# Altium PCB ECOGr2.PcbDoc
Units mm, origin at the board's own origin, x right, y up, seen from the top; angles counter-clockwise.
Board outline 24 x 30.4 mm, 2 copper layers (Top Layer, Bottom Layer); 164 components, 89 nets, 439 pads, 9 vias.
Unrouted connection lines stored in the file: 336.
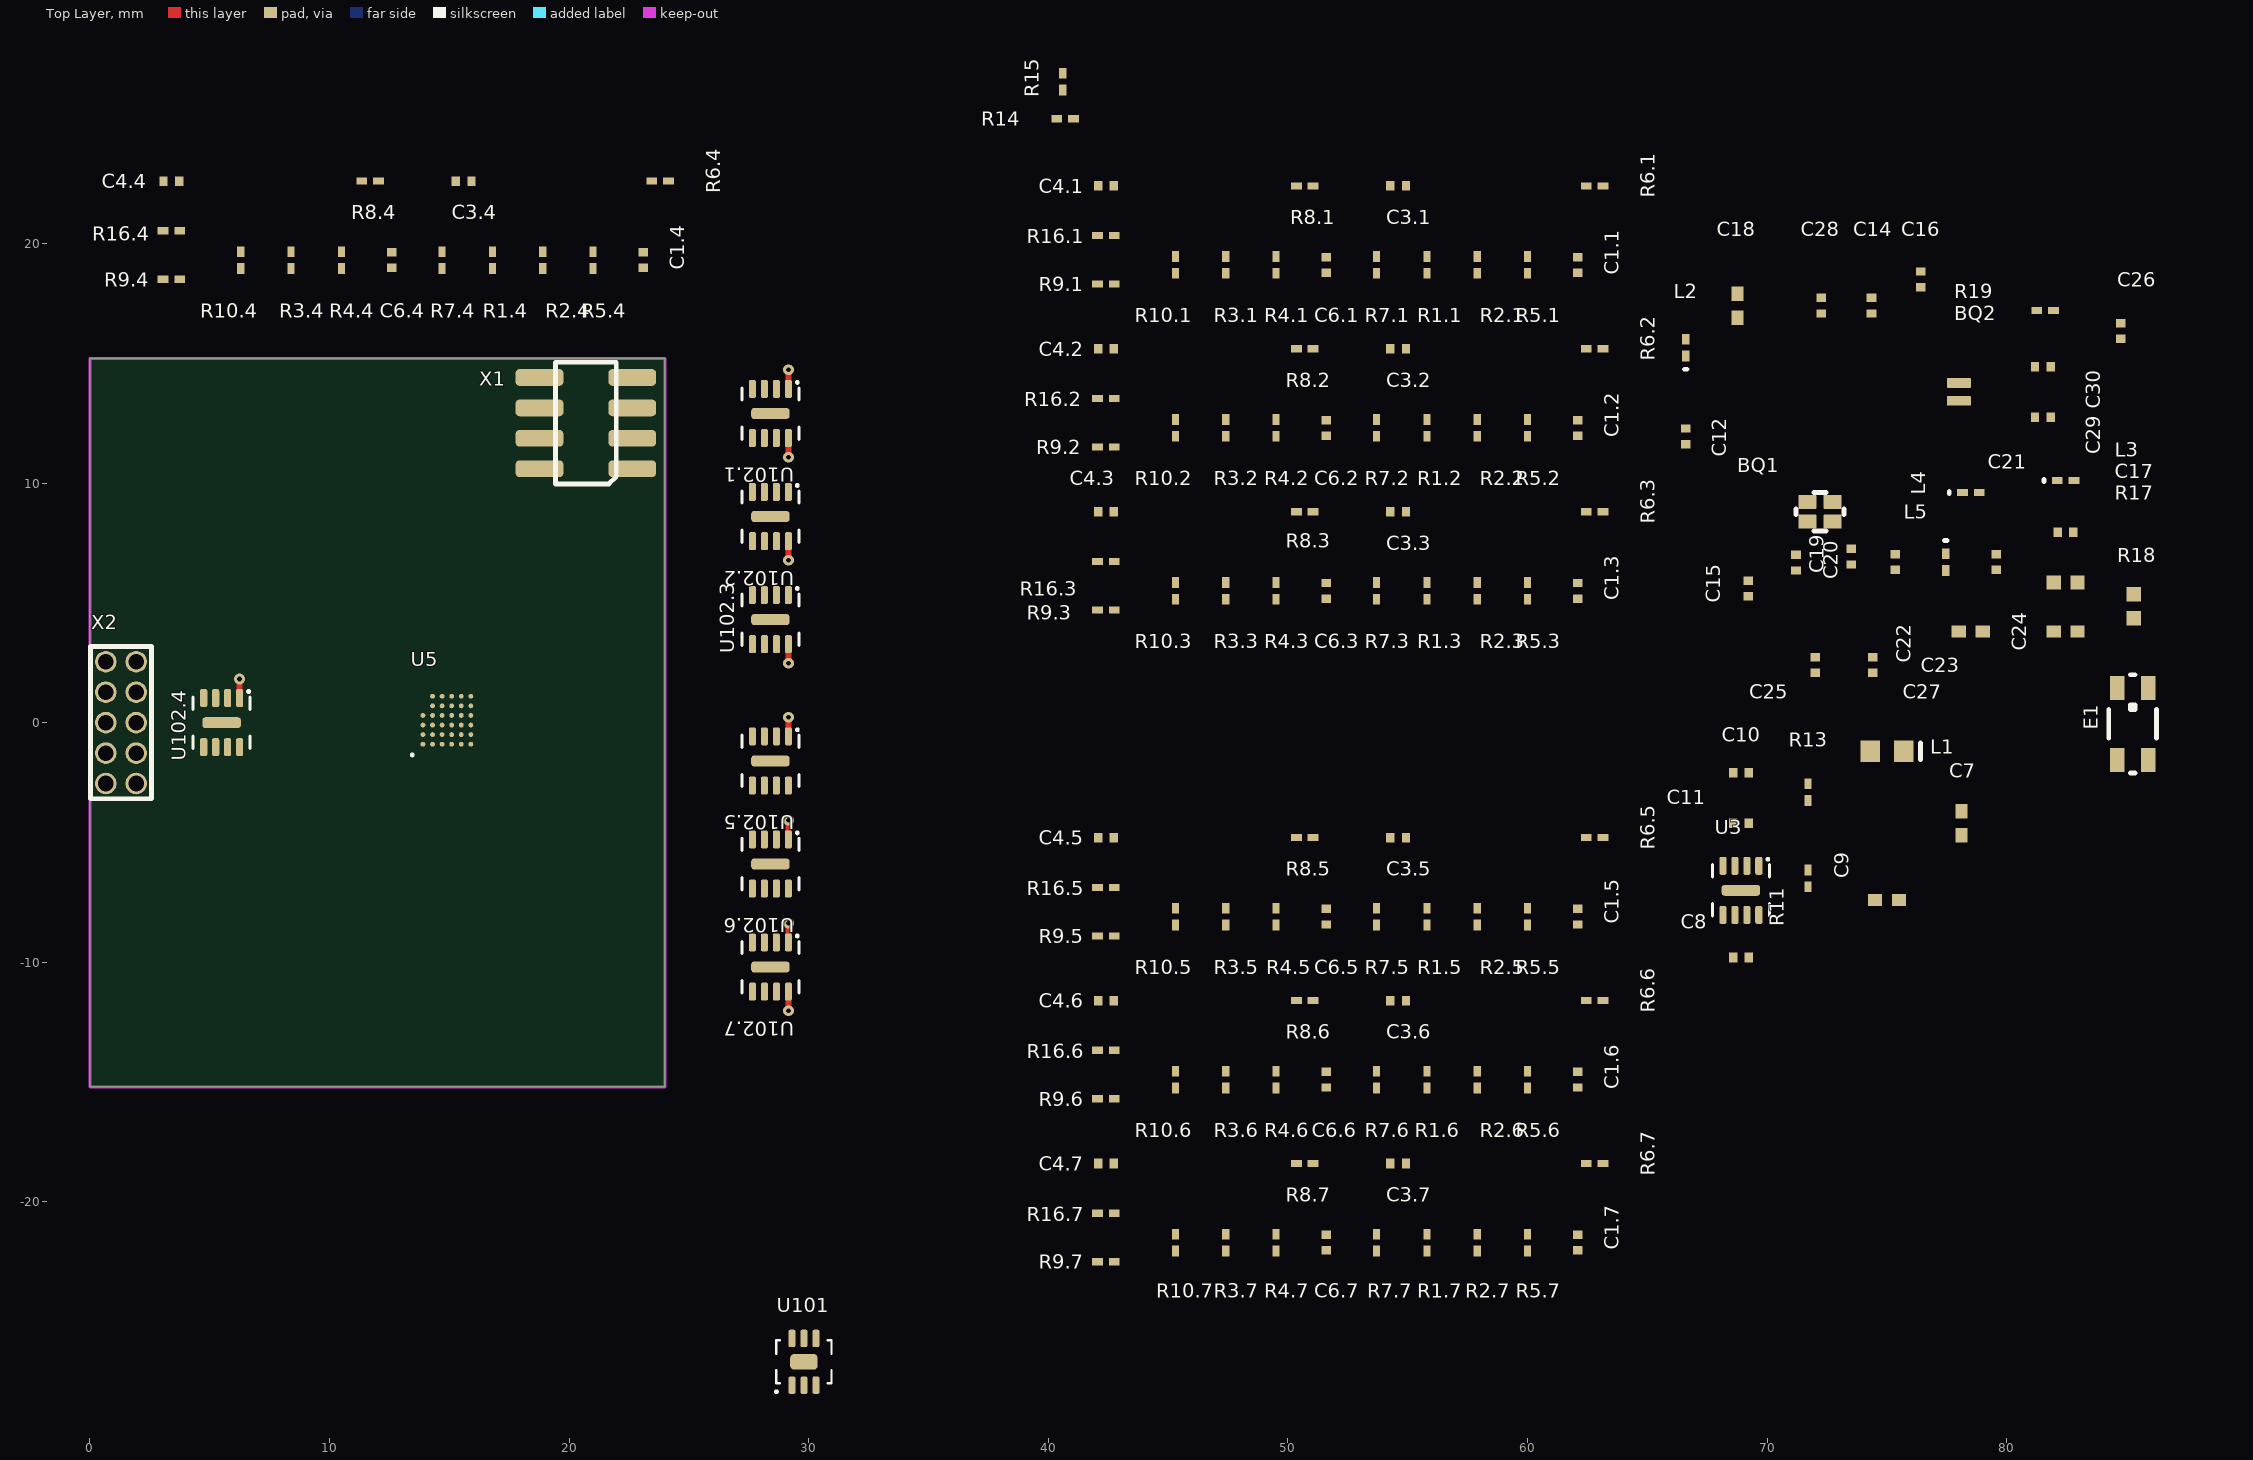
[diagram p0: Top Layer view]
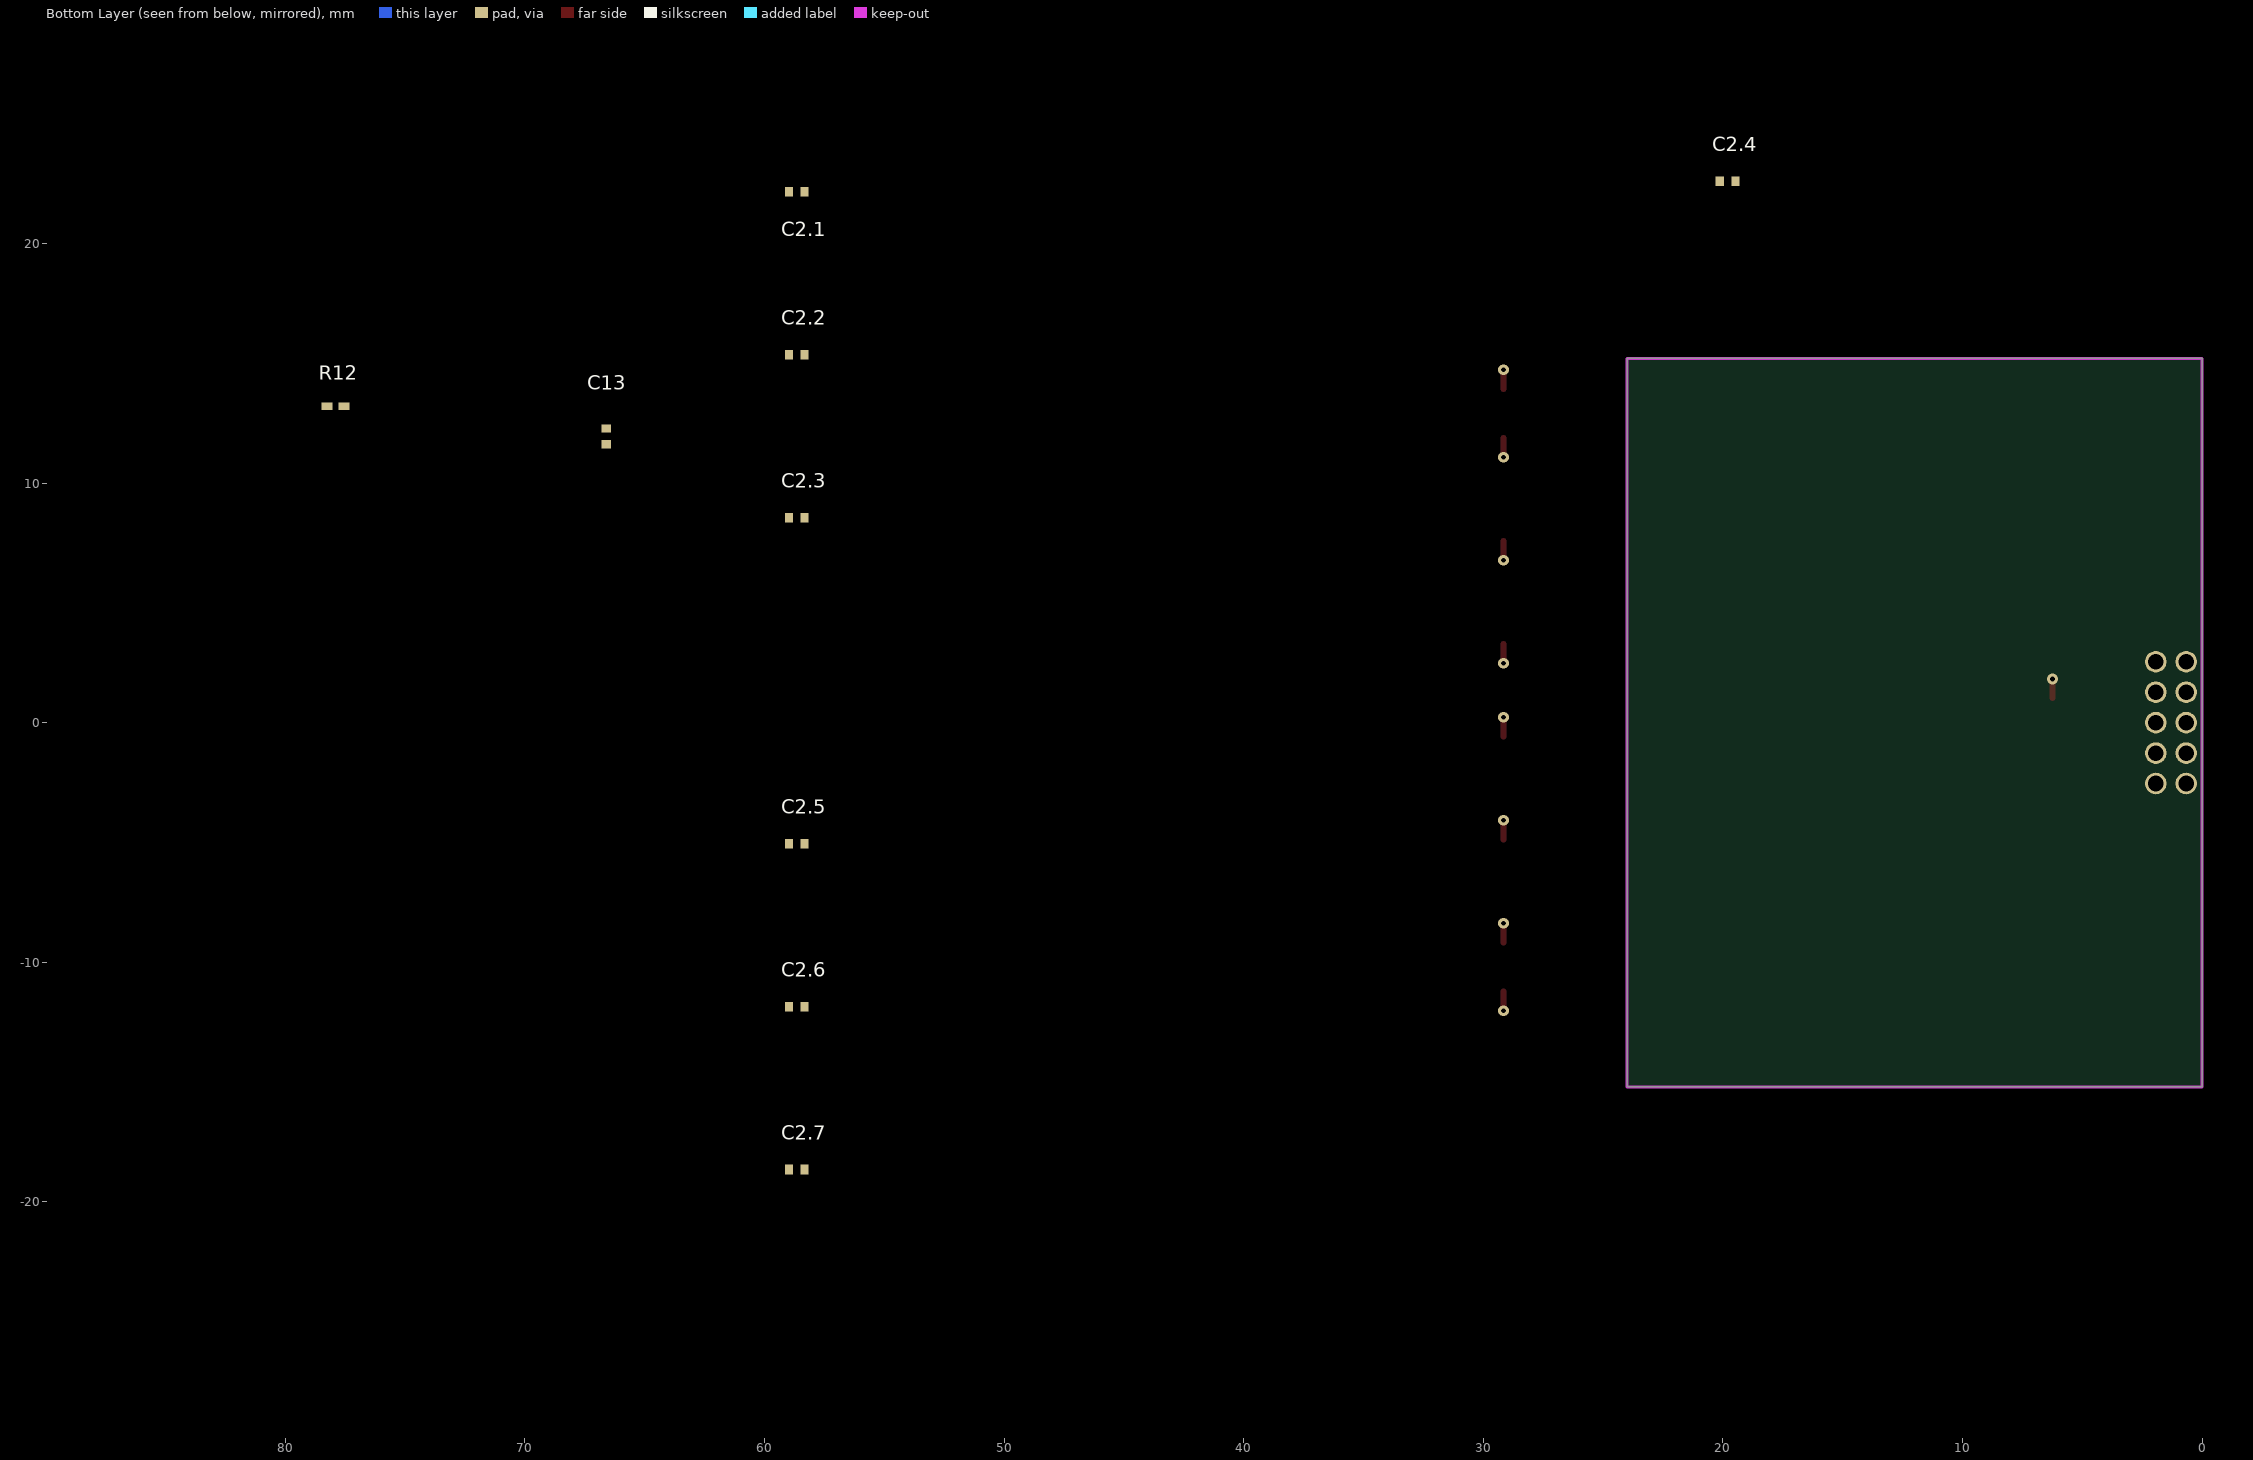
[diagram p1: Bottom Layer view, seen from below]

## Layer stack, top to bottom
Top Solder: solder mask 0.0102, Solder Resist, Dk 3.5
Top Layer: signal copper 0.0356
Dielectric 1: dielectric 0.32, FR-4, Dk 4.8
Bottom Layer: signal copper 0.0356
Bottom Solder: solder mask 0.0102, Solder Resist, Dk 3.5

## Board outline
0,-15.2 24,-15.2 24,15.2 0,15.2

## Design rules (kind name [scope] priority, off if disabled: settings)
Clearance ClearancePoly [InPoly] p1: gap=0.25 ignorepadtopadclearanceinfootprint=FALSE
Clearance [All] p2: gap=0.125 ignorepadtopadclearanceinfootprint=FALSE
HoleSize [All] p1: absolutevalues=TRUE maxlimit=0.9 minlimit=0.2 maxpercent=80.000 minpercent=20.000
PolygonConnect PolygonConnectE1 [HasFootprint('2450AT18D0100')] p1: connectstyle=Direct reliefconductorwidth=0.254 reliefentries=4 polygonreliefangle="90 Angle" airgapwidth=0.254
PolygonConnect [All] p2: thpad.connectstyle=Relief thpad.reliefconductorwidth=0.25 thpad.reliefentries=4 thpad.polygonreliefangle="90 Angle" thpad.airgapwidth=0.25 smdpad.connectstyle=Relief smdpad.reliefconductorwidth=0.25 smdpad.reliefentries=4 smdpad.polygonreliefangle="90 Angle" smdpad.airgapwidth=0.25 via.connectstyle=Direct via.reliefconductorwidth=0.25 via.reliefentries=4 via.polygonreliefangle="90 Angle" via.airgapwidth=0.25
RoutingVias [All] p1: holewidth=0.2 width=0.45 viastyle="Through Hole" minholewidth=0.2 minwidth=0.45 maxholewidth=0.9 maxwidth=1.5
SolderMaskExpansion [All] p1: expansion=0.102
Width [All] p1: maxlimit=0.5 minlimit=0.125 preferedwidth=0.25
29 further rules are at their usual default settings.

## Classes and differential pairs
channel class AinCHr2: A1 A2 A3 A4 A5 A6 A7

## Components (designator, comment, footprint, x,y, rotation, side; value= is the part's Value field where it differs from the comment)
BQ1 "KX-4 24MHz" KX–4 72.2,8.8 r180 top
BQ2 "KX-327" KX–327VT 78,13.8 r270 top value=KX-327VT
C1.1 "1nF 16V" CAPC0603L 62.1,19.1 r270 top (schematic designator C1)
C1.2 "1nF 16V" CAPC0603L 62.1,12.3 r270 top (schematic designator C1)
C1.3 "1nF 16V" CAPC0603L 62.1,5.5 r270 top (schematic designator C1)
C1.4 "1nF 16V" CAPC0603L 23.1,19.3 r270 top (schematic designator C1)
C1.5 "1nF 16V" CAPC0603L 62.1,-8.1 r270 top (schematic designator C1)
C1.6 "1nF 16V" CAPC0603L 62.1,-14.9 r270 top (schematic designator C1)
C1.7 "1nF 16V" CAPC0603L 62.1,-21.7 r270 top (schematic designator C1)
C2.1 "100nF 16V" CAPC0603L 58.65,22.15 r180 bottom (schematic designator C2)
C2.2 "100nF 16V" CAPC0603L 58.65,15.35 r180 bottom (schematic designator C2)
C2.3 "100nF 16V" CAPC0603L 58.65,8.55 r180 bottom (schematic designator C2)
C2.4 "100nF 16V" CAPC0603L 19.8,22.6 r180 bottom (schematic designator C2)
C2.5 "100nF 16V" CAPC0603L 58.65,-5.05 r180 bottom (schematic designator C2)
C2.6 "100nF 16V" CAPC0603L 58.65,-11.85 r180 bottom (schematic designator C2)
C2.7 "100nF 16V" CAPC0603L 58.65,-18.65 r180 bottom (schematic designator C2)
C3.1 "10nF 16V" CAPC0603L 54.6,22.4 r180 top (schematic designator C3)
C3.2 "10nF 16V" CAPC0603L 54.6,15.6 r180 top (schematic designator C3)
C3.3 "10nF 16V" CAPC0603L 54.6,8.8 r180 top (schematic designator C3)
C3.4 "10nF 16V" CAPC0603L 15.6,22.6 r180 top (schematic designator C3)
C3.5 "10nF 16V" CAPC0603L 54.6,-4.8 r180 top (schematic designator C3)
C3.6 "10nF 16V" CAPC0603L 54.6,-11.6 r180 top (schematic designator C3)
C3.7 "10nF 16V" CAPC0603L 54.6,-18.4 r180 top (schematic designator C3)
C4.1 "1uF 6.3V" CAPC0603L 42.4,22.4 r0 top (schematic designator C4)
C4.2 "1uF 6.3V" CAPC0603L 42.4,15.6 r0 top (schematic designator C4)
C4.3 "1uF 6.3V" CAPC0603L 42.4,8.8 r0 top (schematic designator C4)
C4.4 "1uF 6.3V" CAPC0603L 3.4,22.6 r0 top (schematic designator C4)
C4.5 "1uF 6.3V" CAPC0603L 42.4,-4.8 r0 top (schematic designator C4)
C4.6 "1uF 6.3V" CAPC0603L 42.4,-11.6 r0 top (schematic designator C4)
C4.7 "1uF 6.3V" CAPC0603L 42.4,-18.4 r0 top (schematic designator C4)
C6.1 "4.7uF 4V" CAPC0603L 51.6,19.1 r90 top (schematic designator C6)
C6.2 "4.7uF 4V" CAPC0603L 51.6,12.3 r90 top (schematic designator C6)
C6.3 "4.7uF 4V" CAPC0603L 51.6,5.5 r90 top (schematic designator C6)
C6.4 "4.7uF 4V" CAPC0603L 12.6,19.3 r90 top (schematic designator C6)
C6.5 "4.7uF 4V" CAPC0603L 51.6,-8.1 r90 top (schematic designator C6)
C6.6 "4.7uF 4V" CAPC0603L 51.6,-14.9 r90 top (schematic designator C6)
C6.7 "4.7uF 4V" CAPC0603L 51.6,-21.7 r90 top (schematic designator C6)
C7 "10u 6.3V" CAPC1005L 78.1,-4.2 r270 top
C8 "100nF 16V" CAPC0603L 68.9,-9.8 r180 top
C9 "10u 6.3V" CAPC1005L 75,-7.4 r0 top
C10 "4.7uF 4V" CAPC0603L 68.9,-2.1 r180 top
C11 "100nF 16V" CAPC0603L 68.9,-4.2 r180 top
C12 "100nF 16V" CAPC0603L 66.6,11.95 r270 top
C13 "4.7uF 4V" CAPC0603L 66.6,11.95 r270 bottom
C14 "100nF 16V" CAPC0603L 74.35,17.4 r90 top
C15 "100nF 16V" CAPC0603L 69.2,5.6 r270 top
C16 "4.7uF 4V" CAPC0603L 76.4,18.5 r90 top
C17 "6.8p 50V" CAPC0603L 82.45,7.95 r0 top
C18 "10u 6.3V" CAPC1005L 68.75,17.4 r90 top
C19 "100nF 16V" CAPC0603L 73.5,6.925 r270 top
C20 "100nF 16V" CAPC0603L 71.2,6.675 r270 top
C21 "1p 50V" CAPC0603L 79.55,6.7 r270 top
C22 "1p 50V" CAPC0603L 75.35,6.7 r270 top
C23 "DNM" CAPC1005L 78.5,3.8 r0 top
C24 "DNM" CAPC1005L 82.45,3.8 r0 top
C25 "8pF 25V" CAPC0603L 72,2.4 r270 top
C26 "100nF 16V" CAPC0603L 84.75,16.35 r270 top
C27 "8pF 25V" CAPC0603L 74.4,2.4 r270 top
C28 "1uF 6.3V" CAPC0603L 72.25,17.4 r90 top
C29 "12pF 25V" CAPC0603L 81.5,12.75 r0 top
C30 "12pF 25V" CAPC0603L 81.5,14.85 r0 top
E1 "2450AT18D0100" 2450AT18D0100 85.25,-0.05 r270 top
L1 "4.7uH" INDC1608L 75,-1.2 r180 top
L2 "10uH" INDC0603L 66.6,15.65 r90 top
L3 "2.4nH" INDC0603L 82.45,10.1 r0 top
L4 "6.2nH" INDC0603L 78.5,9.6 r0 top
L5 "2.7nH" INDC0603L 77.45,6.7 r270 top
R1.1 "1k" RESC0603L 55.8,19.1 r270 top (schematic designator R1)
R1.2 "1k" RESC0603L 55.8,12.3 r270 top (schematic designator R1)
R1.3 "1k" RESC0603L 55.8,5.5 r270 top (schematic designator R1)
R1.4 "1k" RESC0603L 16.8,19.3 r270 top (schematic designator R1)
R1.5 "1k" RESC0603L 55.8,-8.1 r270 top (schematic designator R1)
R1.6 "1k" RESC0603L 55.8,-14.9 r270 top (schematic designator R1)
R1.7 "1k" RESC0603L 55.8,-21.7 r270 top (schematic designator R1)
R2.1 "38k3" RESC0603L 57.9,19.1 r270 top (schematic designator R2)
R2.2 "38k3" RESC0603L 57.9,12.3 r270 top (schematic designator R2)
R2.3 "38k3" RESC0603L 57.9,5.5 r270 top (schematic designator R2)
R2.4 "38k3" RESC0603L 18.9,19.3 r270 top (schematic designator R2)
R2.5 "38k3" RESC0603L 57.9,-8.1 r270 top (schematic designator R2)
R2.6 "38k3" RESC0603L 57.9,-14.9 r270 top (schematic designator R2)
R2.7 "38k3" RESC0603L 57.9,-21.7 r270 top (schematic designator R2)
R3.1 "1k" RESC0603L 47.4,19.1 r270 top (schematic designator R3)
R3.2 "1k" RESC0603L 47.4,12.3 r270 top (schematic designator R3)
R3.3 "1k" RESC0603L 47.4,5.5 r270 top (schematic designator R3)
R3.4 "1k" RESC0603L 8.4,19.3 r270 top (schematic designator R3)
R3.5 "1k" RESC0603L 47.4,-8.1 r270 top (schematic designator R3)
R3.6 "1k" RESC0603L 47.4,-14.9 r270 top (schematic designator R3)
R3.7 "1k" RESC0603L 47.4,-21.7 r270 top (schematic designator R3)
R4.1 "38k3" RESC0603L 49.5,19.1 r270 top (schematic designator R4)
R4.2 "38k3" RESC0603L 49.5,12.3 r270 top (schematic designator R4)
R4.3 "38k3" RESC0603L 49.5,5.5 r270 top (schematic designator R4)
R4.4 "38k3" RESC0603L 10.5,19.3 r270 top (schematic designator R4)
R4.5 "38k3" RESC0603L 49.5,-8.1 r270 top (schematic designator R4)
R4.6 "38k3" RESC0603L 49.5,-14.9 r270 top (schematic designator R4)
R4.7 "38k3" RESC0603L 49.5,-21.7 r270 top (schematic designator R4)
R5.1 "26k1" RESC0603L 60,19.1 r270 top (schematic designator R5)
R5.2 "26k1" RESC0603L 60,12.3 r270 top (schematic designator R5)
R5.3 "26k1" RESC0603L 60,5.5 r270 top (schematic designator R5)
R5.4 "26k1" RESC0603L 21,19.3 r270 top (schematic designator R5)
R5.5 "26k1" RESC0603L 60,-8.1 r270 top (schematic designator R5)
R5.6 "26k1" RESC0603L 60,-14.9 r270 top (schematic designator R5)
R5.7 "26k1" RESC0603L 60,-21.7 r270 top (schematic designator R5)
R6.1 "0" RESC0603L 62.8,22.4 r180 top (schematic designator R6)
R6.2 "0" RESC0603L 62.8,15.6 r180 top (schematic designator R6)
R6.3 "0" RESC0603L 62.8,8.8 r180 top (schematic designator R6)
R6.4 "0" RESC0603L 23.8,22.6 r180 top (schematic designator R6)
R6.5 "0" RESC0603L 62.8,-4.8 r180 top (schematic designator R6)
R6.6 "0" RESC0603L 62.8,-11.6 r180 top (schematic designator R6)
R6.7 "0" RESC0603L 62.8,-18.4 r180 top (schematic designator R6)
R7.1 "187k" RESC0603L 53.7,19.1 r90 top (schematic designator R7)
R7.2 "187k" RESC0603L 53.7,12.3 r90 top (schematic designator R7)
R7.3 "187k" RESC0603L 53.7,5.5 r90 top (schematic designator R7)
R7.4 "187k" RESC0603L 14.7,19.3 r90 top (schematic designator R7)
R7.5 "187k" RESC0603L 53.7,-8.1 r90 top (schematic designator R7)
R7.6 "187k" RESC0603L 53.7,-14.9 r90 top (schematic designator R7)
R7.7 "187k" RESC0603L 53.7,-21.7 r90 top (schematic designator R7)
R8.1 "26k1" RESC0603L 50.7,22.4 r0 top (schematic designator R8)
R8.2 "26k1" RESC0603L 50.7,15.6 r0 top (schematic designator R8)
R8.3 "26k1" RESC0603L 50.7,8.8 r0 top (schematic designator R8)
R8.4 "26k1" RESC0603L 11.7,22.6 r0 top (schematic designator R8)
R8.5 "26k1" RESC0603L 50.7,-4.8 r0 top (schematic designator R8)
R8.6 "26k1" RESC0603L 50.7,-11.6 r0 top (schematic designator R8)
R8.7 "26k1" RESC0603L 50.7,-18.4 r0 top (schematic designator R8)
R9.1 "10M" RESC0603L 42.4,18.3 r180 top (schematic designator R9)
R9.2 "10M" RESC0603L 42.4,11.5 r180 top (schematic designator R9)
R9.3 "10M" RESC0603L 42.4,4.7 r180 top (schematic designator R9)
R9.4 "10M" RESC0603L 3.4,18.5 r180 top (schematic designator R9)
R9.5 "10M" RESC0603L 42.4,-8.9 r180 top (schematic designator R9)
R9.6 "10M" RESC0603L 42.4,-15.7 r180 top (schematic designator R9)
R9.7 "10M" RESC0603L 42.4,-22.5 r180 top (schematic designator R9)
R10.1 "511k" RESC0603L 45.3,19.1 r270 top (schematic designator R10)
R10.2 "511k" RESC0603L 45.3,12.3 r270 top (schematic designator R10)
R10.3 "511k" RESC0603L 45.3,5.5 r270 top (schematic designator R10)
R10.4 "511k" RESC0603L 6.3,19.3 r270 top (schematic designator R10)
R10.5 "511k" RESC0603L 45.3,-8.1 r270 top (schematic designator R10)
R10.6 "511k" RESC0603L 45.3,-14.9 r270 top (schematic designator R10)
R10.7 "511k" RESC0603L 45.3,-21.7 r270 top (schematic designator R10)
R11 "10k" RESC0603L 71.7,-6.5 r270 top
R12 "10k" RESC0603L 77.9,13.2 r180 bottom
R13 "10k" RESC0603L 71.7,-2.9 r270 top
R14 "4k99" RESC0603L 40.7,25.2 r180 top
R15 "0" RESC0603L 40.6,26.75 r270 top
R16.1 "0" RESC0603L 42.4,20.325 r180 top (schematic designator R16)
R16.2 "0" RESC0603L 42.4,13.525 r180 top (schematic designator R16)
R16.3 "0" RESC0603L 42.4,6.725 r180 top (schematic designator R16)
R16.4 "0" RESC0603L 3.4,20.525 r180 top (schematic designator R16)
R16.5 "0" RESC0603L 42.4,-6.875 r180 top (schematic designator R16)
R16.6 "0" RESC0603L 42.4,-13.675 r180 top (schematic designator R16)
R16.7 "0" RESC0603L 42.4,-20.475 r180 top (schematic designator R16)
R17 "0" RESC1005L 82.45,5.85 r0 top
R18 "0" RESC1005L 85.3,4.85 r270 top
R19 "100k" RESC0603L 81.6,17.2 r180 top
U3 "LMX358IQ2T" SON50P200X60_HS-9L 68.9,-7 r270 top
U5 "Bluetooth wireless MCU" BGA34C40P6X6_268X268X57 14.9,0.1 r90 top value=CC2640R2FYFV
U101 "Step-up converter" SON50P150X60_HS-7L 29.8,-26.675 r90 top value=SC120ULTRT
U102.1 "LMX358IQ2T" SON50P200X60_HS-9L 28.4,12.9 r270 top (schematic designator U102)
U102.2 "LMX358IQ2T" SON50P200X60_HS-9L 28.4,8.6 r270 top (schematic designator U102)
U102.3 "LMX358IQ2T" SON50P200X60_HS-9L 28.4,4.3 r270 top (schematic designator U102)
U102.4 "LMX358IQ2T" SON50P200X60_HS-9L 5.5,0 r270 top (schematic designator U102)
U102.5 "LMX358IQ2T" SON50P200X60_HS-9L 28.4,-1.6 r270 top (schematic designator U102)
U102.6 "LMX358IQ2T" SON50P200X60_HS-9L 28.4,-5.9 r270 top (schematic designator U102)
U102.7 "LMX358IQ2T" SON50P200X60_HS-9L 28.4,-10.2 r270 top (schematic designator U102)
X1 "CLP-104-02-L-D" HDR-1.27mm-2X4-smd 20.7,12.5 r90 top
X2 "Amphenol FCI 20021311-00010T4LF" HDR-1.27mm-2X5 1.3,0 r270 top

## Footprints (in the part's own frame and the unit in brackets; to place one, negate y for a bottom-side part, rotate by r counter-clockwise, add the part's x,y. Pads: shape width x height; smd on the part's side, far side on the other; paste and mask are expansions set on the pad)
2450AT18D0100 [mm] "2.45 GHz SMD Antenna"
  rect 1x0.6 smd: 1(-1.5,-0.65) 2(-1.5,0.65) 2(1.5,0.65) 2(1.5,-0.65)
  silkscreen extent -2.05,-1 2.05,1, body extent -1.6,-0.8 1.6,0.8, height 1.2
BGA34C40P6X6_268X268X57 [mm] "BGA, 34-Leads, Body 2,68x2,68mmx0,57mm, Pitch 0,40mm"
  round 0.2 smd: A1(-1,1) A2(-0.6,1) A3(-0.2,1) A4(0.2,1) B1(-1,0.6) B2(-0.6,0.6) B3(-0.2,0.6) B4(0.2,0.6) B5(0.6,0.6) B6(1,0.6) C1(-1,0.2) C2(-0.6,0.2) C3(-0.2,0.2) C4(0.2,0.2) C5(0.6,0.2) C6(1,0.2) D1(-1,-0.2) D2(-0.6,-0.2) D3(-0.2,-0.2) D4(0.2,-0.2) D5(0.6,-0.2) D6(1,-0.2) E1(-1,-0.6) E2(-0.6,-0.6) E3(-0.2,-0.6) E4(0.2,-0.6) E5(0.6,-0.6) E6(1,-0.6) F1(-1,-1) F2(-0.6,-1) F3(-0.2,-1) F4(0.2,-1) F5(0.6,-1) F6(1,-1)
  silkscreen extent -1.49,1.4 -1.4,1.49, body extent -1.34,-1.34 1.34,1.34, height 0.58
CAPC0603L [mm] "Chip Capacitor, Body 0.6x0.3mm, IPC High Density"
  rect 0.35x0.4 smd: 1(-0.325,0) 2(0.325,0)
  body extent -0.35,-0.2 0.35,0.2, height 0.6
CAPC1005L [mm] "Chip Capacitor, Body 1.0x0.5mm, IPC High Density"
  rect 0.6x0.5 smd: 1(-0.5,0) 2(0.5,0)
  body extent -0.55,-0.3 0.55,0.3, height 0.6
HDR-1.27mm-2X4-smd [mm] "Header 1.27mm"
  rrect50% 0.7x2 smd: 1(-1.905,-1.935) 2(-1.905,1.935) 3(-0.635,-1.935) 4(-0.635,1.935) 5(0.635,-1.935) 6(0.635,1.935) 7(1.905,-1.935) 8(1.905,1.935)
  silkscreen extent -2.54,-1.27 2.54,1.27, body extent -2.54,-1.27 2.55,1.27, height 1.5
HDR-1.27mm-2X5 [mm] "Header 1.27mm"
  round 0.9 hole 0.65: 1(-2.54,-0.635) 2(-2.54,0.635) 3(-1.27,-0.635) 4(-1.27,0.635) 5(0,-0.635) 6(0,0.635) 7(1.27,-0.635) 8(1.27,0.635) 9(2.54,-0.635) 10(2.54,0.635)
  silkscreen extent -3.18,-1.27 3.18,1.27, body extent -3.18,-1.27 3.18,1.27, height 1.5
INDC0603L [mm] "Chip Inductor, Body 0.6x0.3mm, IPC High Density"
  rect 0.45x0.3 smd: 1(-0.35,0) 2(0.35,0)
  silkscreen extent -0.9,-0.05 -0.9,0.05, body extent -0.33,-0.18 0.33,0.18, height 0.35
INDC1608L [mm] "Chip Inductor, Body 1.6x0.8mm, IPC High Density"
  rect 0.8x0.9 smd: 1(-0.7,0) 2(0.7,0)
  silkscreen extent -1.4,-0.35 -1.4,0.35, body extent -0.87,-0.48 0.87,0.48, height 0.71
KX–4 [mm]
  rrect10% 0.75x0.58 smd: 1(-0.525,-0.41) 2(0.525,-0.41) 3(0.525,0.41) 4(-0.525,0.41)
  silkscreen extent -1,-0.8 1,0.8, body extent -0.8,-0.6 0.8,0.6, height 0.8
KX–327VT [mm] "Tuning Fork Crystal"
  rrect10% 0.4x1 smd: 1(-0.375,0) 2(0.375,0)
  body extent -0.62,-0.53 0.62,0.52, height 0.5
RESC0603L [mm] "Chip Resistor, Body 0.6x0.3mm, IPC High Density"
  rect 0.45x0.3 smd: 1(-0.35,0) 2(0.35,0)
  body extent -0.32,-0.17 0.32,0.17, height 0.3
RESC1005L [mm] "Chip Resistor, Body 1.1x0.5mm, IPC High Density"
  rect 0.6x0.6 smd: 1(-0.5,0) 2(0.5,0)
  body extent -0.55,-0.3 0.55,0.3, height 0.4
SON50P150X60_HS-7L [mm] "SON, 6-Leads, Body 2.00x1.50mm, Pitch 0.50mm, Thermal Pad 1.15x0.19mm, IPC High Density"
  rrect50% 0.73x0.29 smd: 1(-0.975,0.5) 2(-0.975,0) 3(-0.975,-0.5) 4(0.975,-0.5) 5(0.975,0) 6(0.975,0.5)
  rrect50% 0.65x1.15 smd paste-0.095: 7(0,0)
  silkscreen extent -1.3,-1.15 0.9,1.2, body extent -0.8,-1.05 0.8,1.05, height 0.6
SON50P200X60_HS-9L [mm] "SON, 8-Leads, Body 2,00x2,00mm, Pitch 0,50mm, Thermal Pad 1,58x0,59mm, IPC High Density"
  rrect50% 0.75x0.3 smd: 1(-1.025,0.75) 2(-1.025,0.25) 3(-1.025,-0.25) 4(-1.025,-0.75) 5(1.025,-0.75) 6(1.025,-0.25) 7(1.025,0.25) 8(1.025,0.75)
  rrect50% 0.45x1.6 smd: 9(0,0)
  silkscreen extent -1.35,-1.19 1.08,1.19, body extent -1.07,-1.07 1.08,1.08, height 0.6

## Part data
BQ1: library part "KX series", "SURFACE MOUNT CRYSTAL", CAT#="CTX1416CT-ND #Digikey"
BQ2: "SURFACE MOUNT CRYSTAL", CAT#="XC2282CT-ND #Digikey"
C1.1 C1.2 C1.3 C1.4 C1.5 C1.6 C1.7 C2.1 C2.2 C2.3 C2.4 C2.5 C2.6 C2.7 C3.1 C3.2 C3.3 C3.4 C3.5 C3.6 C3.7 C4.1 C4.2 C4.3 C4.4 C4.5 C4.6 C4.7 C6.1 C6.2 C6.3 C6.4 C6.5 C6.6 C6.7 C8 C10 C11 C12 C13 C14 C15 C16 C17 C19 C20 C21 C22 C25 C26 C27 C28 C29 C30: library part Capacitor, "Capacitor", Package=0201
  C1.1 C1.2 C1.3 C1.4 C1.5 C1.6 C1.7: CAT#="490-6147-1-ND #Digikey"
  C2.1 C2.2 C2.3 C2.4 C2.5 C2.6 C2.7 C8 C11 C12 C14 C15 C19 C20 C26: CAT#="490-9985-1-ND #Digikey"
  C3.1 C3.2 C3.3 C3.4 C3.5 C3.6 C3.7: CAT#="490-7223-1-ND #Digikey"
  C4.1 C4.2 C4.3 C4.4 C4.5 C4.6 C4.7 C28: CAT#="1276-1323-1-ND #Digikey"
  C6.1 C6.2 C6.3 C6.4 C6.5 C6.6 C6.7 C10 C13 C16: CAT#="490-13229-1-ND #Digikey"
  C17: CAT#="490-11341-1-ND #Digikey"
  C21 C22: CAT#="490-9660-1-ND #Digikey"
  C25 C27: CAT#="490-12681-6-ND #Digikey"
  C29 C30: CAT#="490-3144-1-ND #Digikey"
C7 C9 C18 C23 C24: library part Capacitor, "Capacitor", Package=0402
  C7 C9 C18: CAT#="1276-1451-6-ND #Digikey"
  C23 C24: CAT#=-
E1: library part Antenna, "Antenna", CAT#="712-1573-1-ND #Digikey"
L1 L2: library part Inductor, "Inductor", Package=0603
  L1: CAT#="490-12065-6-ND #Digikey"
  L2: CAT#="587-1720-1-ND #Digikey"
L3 L4 L5: library part Inductor, "Inductor", Package=0201
  L3: CAT#="490-6724-1-ND #Digikey"
  L4: CAT#="490-5563-1-ND #Digikey"
  L5: CAT#="490-6725-1-ND #Digikey"
R1.1 R1.2 R1.3 R1.4 R1.5 R1.6 R1.7 R2.1 R2.2 R2.3 R2.4 R2.5 R2.6 R2.7 R3.1 R3.2 R3.3 R3.4 R3.5 R3.6 R3.7 R4.1 R4.2 R4.3 R4.4 R4.5 R4.6 R4.7 R5.1 R5.2 R5.3 R5.4 R5.5 R5.6 R5.7 R6.1 R6.2 R6.3 R6.4 R6.5 R6.6 R6.7 R7.1 R7.2 R7.3 R7.4 R7.5 R7.6 R7.7 R8.1 R8.2 R8.3 R8.4 R8.5 R8.6 R8.7 R9.1 R9.2 R9.3 R9.4 R9.5 R9.6 R9.7 R10.1 R10.2 R10.3 R10.4 R10.5 R10.6 R10.7 R11 R12 R13 R14 R15 R16.1 R16.2 R16.3 R16.4 R16.5 R16.6 R16.7 R19: library part Resistor, "Resistor", Package=0201
  R1.1 R1.2 R1.3 R1.4 R1.5 R1.6 R1.7 R3.1 R3.2 R3.3 R3.4 R3.5 R3.6 R3.7: CAT#="P1.00KABCT-ND #Digikey"
  R2.1 R2.2 R2.3 R2.4 R2.5 R2.6 R2.7 R4.1 R4.2 R4.3 R4.4 R4.5 R4.6 R4.7: CAT#="P38.3KABCT-ND #Digikey"
  R5.1 R5.2 R5.3 R5.4 R5.5 R5.6 R5.7 R8.1 R8.2 R8.3 R8.4 R8.5 R8.6 R8.7: CAT#="P26.1KABCT-ND #Digikey"
  R6.1 R6.2 R6.3 R6.4 R6.5 R6.6 R6.7 R15 R16.1 R16.2 R16.3 R16.4 R16.5 R16.6 R16.7: CAT#="P15979CT-ND #Digikey"
  R7.1 R7.2 R7.3 R7.4 R7.5 R7.6 R7.7: CAT#="P187KABCT-ND #Digikey"
  R9.1 R9.2 R9.3 R9.4 R9.5 R9.6 R9.7: CAT#="RHM10MCBCT-ND #Digikey"
  R10.1 R10.2 R10.3 R10.4 R10.5 R10.6 R10.7: CAT#="P511KABCT-ND #Digikey"
  R11 R12 R13: CAT#="P10.0KABCT-ND #Digikey"
  R14: CAT#="P4.99KABCT-ND #Digikey"
  R19: CAT#="P100KABCT-ND #Digikey"
R17 R18: library part Resistor, "Resistor", Package=0402, CAT#="RHM1692-1-ND #Digikey"
U3 U102.1 U102.2 U102.3 U102.4 U102.5 U102.6 U102.7: library part LMX358, "Operational Amplifier for Cost-Sensitive Systems"
  U3: CAT#=#Digikey
  U102.1 U102.2 U102.3 U102.4 U102.5 U102.6 U102.7: CAT#="497-14860-1-ND #Digikey"
U5: library part CC2640R2FYFV, CAT#="296-45379-1-ND #Digikey"
U101: library part SC120ULTRT, CAT#="SC120ULCT-ND #Digikey"
X1: library part DB-8F, "Header", CAT#="SAM1155-04-ND #Digikey"
X2: library part DB-10F, "Header", CAT#="609-3754-ND #Digikey"

## Via types
v1: diameter 0.45, hole 0.2, Top Layer to Bottom Layer, 9 vias

## Nets (pads, with @x,y where several pads share a name; then routed paths per layer and width w, separated by ;. In a path a pad name is that pad's centre, name@x,y a point inside that pad or via, vN(x,y) a via of type N, cw(c..) or ccw(c..) an arc to the next point about the centre after c; other vN are vias at no path point)
A1: R6.1.1 U5.D2
A2: R6.2.1 U5.D3
A3: R6.3.1 R15.1 U5.A1
A4: R6.4.1 U5.C2
A5: R6.5.1 U5.B2
A6: R6.6.1 U5.D4
A7: R6.7.1 U5.B3
ENVDD: R12.2 U5.F6 U101.4
GND: BQ1.2 BQ1.4 C1.1.2 C1.2.2 C1.3.2 C1.4.2 C1.5.2 C1.6.2 C1.7.2 C2.1.2 C2.2.2 C2.3.2 C2.4.2 C2.5.2 C2.6.2 C2.7.2 C3.1.2 C3.2.2 C3.3.2 C3.4.2 C3.5.2 C3.6.2 C3.7.2 C6.1.2 C6.2.2 C6.3.2 C6.4.2 C6.5.2 C6.6.2 C6.7.2 C7.2 C8.2 C9.2 C10.2 C11.2 C12.2 C13.2 C14.2 C15.2 C16.2 C17.2 C18.2 C19.2 C20.2 C22.2 C23.1 C24.1 C25.2 C26.2 C27.2 C28.2 C29.2 C30.2 E1.2 R12.1 R13.1 U3.4 U5.A4 U5.B1 U5.C6 U5.E1 U101.2 U101.5 U101.7 U102.1.4 U102.2.4 U102.3.4 U102.4.4 U102.5.4 U102.6.4 U102.7.4 X1.3 X1.5 X2.8 X2.10
In1: C4.1.1 R9.1.2 R16.1.2 X2.1
In2: C4.2.1 R9.2.2 R16.2.2 X2.2
In3: C4.3.1 R9.3.2 R14.1 R15.2 R16.3.2 X2.3
In4: C4.4.1 R9.4.2 R16.4.2 X2.4
In5: C4.5.1 R9.5.2 R16.5.2 X2.5
In6: C4.6.1 R9.6.2 R16.6.2 X2.6
In7: C4.7.1 R9.7.2 R16.7.2 X2.7
MR: C26.1 R19.1 U5.E2 X1.7
NetBQ1_1: BQ1.1 C27.1 U5.C4
NetBQ1_3: BQ1.3 C25.1 U5.C3
NetBQ2_1: BQ2.1 C30.1 U5.E6
NetBQ2_2: BQ2.2 C29.1 U5.D6
NetC1.1_1: C1.1.1 R5.1.2 R6.1.2
NetC1.2_1: C1.2.1 R5.2.2 R6.2.2
NetC1.3_1: C1.3.1 R5.3.2 R6.3.2
NetC1.4_1: C1.4.1 R5.4.2 R6.4.2
NetC1.5_1: C1.5.1 R5.5.2 R6.5.2
NetC1.6_1: C1.6.1 R5.6.2 R6.6.2
NetC1.7_1: C1.7.1 R5.7.2 R6.7.2
NetC3.1_1: C3.1.1 R7.1.2 R8.1.2 U102.1.3
NetC3.2_1: C3.2.1 R7.2.2 R8.2.2 U102.2.3
NetC3.3_1: C3.3.1 R7.3.2 R8.3.2 U102.3.3
NetC3.4_1: C3.4.1 R7.4.2 R8.4.2 U102.4.3
NetC3.5_1: C3.5.1 R7.5.2 R8.5.2 U102.5.3
NetC3.6_1: C3.6.1 R7.6.2 R8.6.2 U102.6.3
NetC3.7_1: C3.7.1 R7.7.2 R8.7.2 U102.7.3
NetC4.1_2: C4.1.2 R10.1.1 R16.1.1 U102.1.5
NetC4.2_2: C4.2.2 R10.2.1 R16.2.1 U102.2.5
NetC4.3_2: C4.3.2 R10.3.1 R16.3.1 U102.3.5
NetC4.4_2: C4.4.2 R10.4.1 R16.4.1 U102.4.5
NetC4.5_2: C4.5.2 R10.5.1 R16.5.1 U102.5.5
NetC4.6_2: C4.6.2 R10.6.1 R16.6.1 U102.6.5
NetC4.7_2: C4.7.2 R10.7.1 R16.7.1 U102.7.5
NetC10_1: C10.1 C11.1 R11.1 R13.2 U3.3
NetC17_1: C17.1 L3.2
NetC18_1: C18.1 C19.1 C20.1 L2.2 U5.A3 U5.B4
NetC21_1: C21.1 L3.1 L4.2 U5.B6
NetC21_2: C21.2 C23.2 L5.2 R17.1
NetC22_1: C22.1 L4.1 L5.1 U5.B5
NetC24_2: C24.2 R17.2 R18.1
NetC28_1: C28.1 U5.F3
NetE1_1: E1.1 R18.2
NetL1_2: L1.2 U101.1
NetL2_1: L2.1 U5.D1
NetR1.1_1: R1.1.1 R2.1.2 U102.1.2
NetR1.2_1: R1.2.1 R2.2.2 U102.2.2
NetR1.3_1: R1.3.1 R2.3.2 U102.3.2
NetR1.4_1: R1.4.1 R2.4.2 U102.4.2
NetR1.5_1: R1.5.1 R2.5.2 U102.5.2
NetR1.6_1: R1.6.1 R2.6.2 U102.6.2
NetR1.7_1: R1.7.1 R2.7.2 U102.7.2
NetR2.1_1: R2.1.1 R5.1.1 U102.1.1 | length 0.8
  Top Layer w0.25: U102.1.1 v1(29.15,14.725)
NetR2.2_1: R2.2.1 R5.2.1 U102.2.1
NetR2.3_1: R2.3.1 R5.3.1 U102.3.1
NetR2.4_1: R2.4.1 R5.4.1 U102.4.1 | length 0.8
  Top Layer w0.25: U102.4.1 v1(6.25,1.825)
NetR2.5_1: R2.5.1 R5.5.1 U102.5.1 | length 0.8
  Top Layer w0.25: U102.5.1 v1(29.15,0.225)
NetR2.6_1: R2.6.1 R5.6.1 U102.6.1 | length 0.8
  Top Layer w0.25: U102.6.1 v1(29.15,-4.075)
NetR2.7_1: R2.7.1 R5.7.1 U102.7.1 | length 0.8
  Top Layer w0.25: U102.7.1 v1(29.15,-8.375)
NetR3.1_1: R3.1.1 R4.1.2 U102.1.6
NetR3.2_1: R3.2.1 R4.2.2 U102.2.6
NetR3.3_1: R3.3.1 R4.3.2 U102.3.6
NetR3.4_1: R3.4.1 R4.4.2 U102.4.6
NetR3.5_1: R3.5.1 R4.5.2 U102.5.6
NetR3.6_1: R3.6.1 R4.6.2 U102.6.6
NetR3.7_1: R3.7.1 R4.7.2 U102.7.6
NetR4.1_1: R4.1.1 R8.1.1 U102.1.7
NetR4.2_1: R4.2.1 R8.2.1 U102.2.7
NetR4.3_1: R4.3.1 R8.3.1 U102.3.7
NetR4.4_1: R4.4.1 R8.4.1 U102.4.7
NetR4.5_1: R4.5.1 R8.5.1 U102.5.7
NetR4.6_1: R4.6.1 R8.6.1 U102.6.7
NetR4.7_1: R4.7.1 R8.7.1 U102.7.7
PWM: R9.1.1 R9.2.1 R9.3.1 R9.4.1 R9.5.1 R9.6.1 R9.7.1 U5.C5
TCK: U5.F2 X1.4
TDI: U5.F1 X1.8
TDO: U5.E3 X1.6
TMS: U5.E4 X1.2
VBAT: C7.1 C12.1 C13.1 C14.1 C15.1 C16.1 L1.1 R19.2 U5.A2 U5.C1 U5.F4 U101.3 X1.1 X2.9
VDD: C2.1.1 C2.2.1 C2.3.1 C2.4.1 C2.5.1 C2.6.1 C2.7.1 C8.1 C9.1 R11.2 R14.2 U3.8 U101.6 U102.1.8 U102.2.8 U102.3.8 U102.4.8 U102.5.8 U102.6.8 U102.7.8 | length 3.2
  Top Layer w0.25: v1(29.15,-12.025) U102.7.8 ; v1(29.15,2.475) U102.3.8 ; v1(29.15,6.775) U102.2.8 ; v1(29.15,11.075) U102.1.8
VREF: C6.1.1 C6.2.1 C6.3.1 C6.4.1 C6.5.1 C6.6.1 C6.7.1 R1.1.2 R1.2.2 R1.3.2 R1.4.2 R1.5.2 R1.6.2 R1.7.2 R3.1.2 R3.2.2 R3.3.2 R3.4.2 R3.5.2 R3.6.2 R3.7.2 R7.1.1 R7.2.1 R7.3.1 R7.4.1 R7.5.1 R7.6.1 R7.7.1 R10.1.2 R10.2.2 R10.3.2 R10.4.2 R10.5.2 R10.6.2 R10.7.2 U3.1 U3.2
pads on no net: U3.5 U3.6 U3.7 U3.9 U5.D5 U5.E5 U5.F5 U102.1.9 U102.2.9 U102.3.9 U102.4.9 U102.5.9 U102.6.9 U102.7.9

## Keep-outs
Keep-Out Layer:
  the board outline again, w0.125

## Other copper
Top Layer:
  pour cut-out: 88.15,-2.05 88.15,1.95 80.35,1.95 80.35,-2.05
Bottom Layer:
  pour cut-out: 88.15,-2.05 88.15,1.95 80.35,1.95 80.35,-2.05

## Dimensions
0,-15.2 to 0,15.2 on Mechanical 1
0,-15.2 to 24,-15.2 on Mechanical 1